# Altium PCB Transmitter.PcbDoc
Units mil, origin at the board's own origin, x right, y up, seen from the top; angles counter-clockwise.
Board outline 6000 x 4000 mil, 2 copper layers (Top Layer, Bottom Layer); 31 components, 14 nets, 129 pads, 0 vias.
Unrouted connection lines stored in the file: 29.
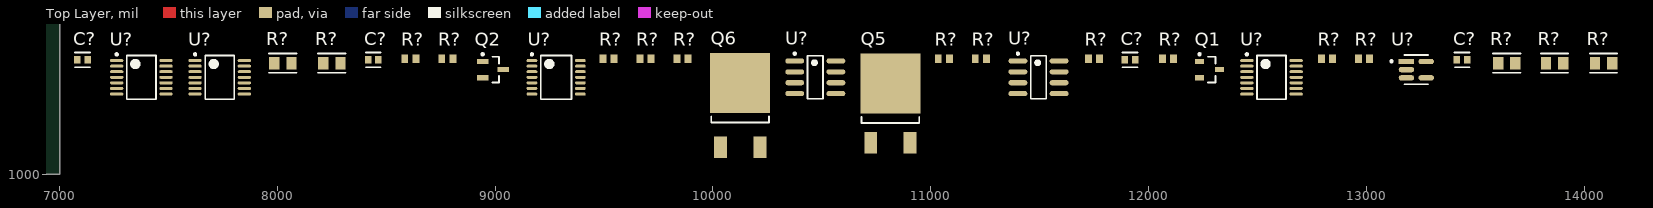
[diagram p0: Top Layer view]
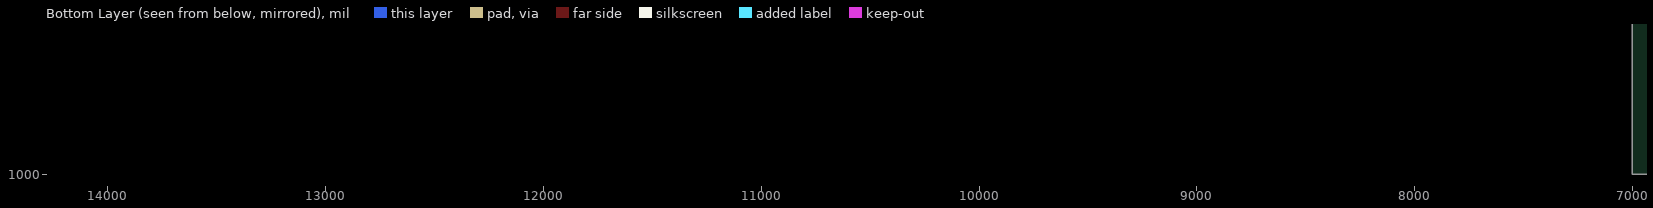
[diagram p1: Bottom Layer view, seen from below]

## Layer stack, top to bottom
Top Solder: solder mask 0.4, Solder Resist, Dk 3.5
Top Layer: signal copper 1.4
Dielectric 1: dielectric 12.6, FR-4, Dk 4.8
Bottom Layer: signal copper 1.4
Bottom Solder: solder mask 0.4, Solder Resist, Dk 3.5

## Board outline
1000,1000 7000,1000 7000,5000 1000,5000

## Design rules (kind name [scope] priority, off if disabled: settings)
Clearance [All] p1: gap=10 ignorepadtopadclearanceinfootprint=FALSE except(0: Arc-Hole Track-Hole SMDPad-Hole THPad-Hole Via-Hole Fill-Hole Poly-Hole Region-Hole Text-Hole)
PolygonConnect [All] p1: connectstyle=Relief reliefconductorwidth=10 reliefentries=4 polygonreliefangle="90 Angle" airgapwidth=10
RoomDefinition Transmitter [InComponentClass('Transmitter')] p1: confinementstyle=ConfineIn formatcopy=TRUE lockcomponents=FALSE outline 7045,1060 14185,1060 14185,1670 7045,1670
RoutingVias [All] p1: holewidth=28 width=50 viastyle="Through Hole" minholewidth=28 minwidth=50 maxholewidth=28 maxwidth=50
SolderMaskExpansion [All] p1: expansion=4 istentingtop=FALSE
Width [All] p1: maxlimit=10 minlimit=10 preferedwidth=10
30 further rules are at their usual default settings.

## Classes and differential pairs
component class Transmitter: C? Q1 Q2 Q5 Q6 R? U?

## Components (designator, comment, footprint, x,y, rotation, side; value= is the part's Value field where it differs from the comment)
C? "47pF" FP-C0603C-CF-MFG 7105,1525 r0 top value="470 pF"
C? "47pF" FP-C0603C-CF-MFG 13440,1525 r0 top value="470 pF"
C? "47pF" FP-C0603C-CF-MFG 11915,1525 r0 top value="470 pF"
C? "47pF" FP-C0603C-CF-MFG 8440,1525 r0 top value="470 pF"
Q1 "BC857C" INF-SOT23_N 12280,1480 r0 top
Q2 "BC847B" INF-SOT23_M 8990,1480 r0 top
Q5 "IRFR9024NTRPBF" FP-PG-TO252-3-MFG 10815,1325 r0 top
Q6 "AUIRFR024N" FP-TO-252AA-MFG 10125,1360 r0 top
R? "RC0805FR-4,99" FP-RC0805-0_6-IPC_A 13865,1510 r0 top
R? "150K" RESC1609X50X30NL8T20 9520,1530 r0 top
R? "CRCW0603  100" RESC1609X50X30NL8T20 12820,1530 r0 top
R? "CRCW060310K0FKEA" RESC1609X50X30NL8T20 12090,1530 r0 top
R? "RC0805FR-4,99" FP-RC0805-0_6-IPC_A 14090,1510 r0 top
R? "RC0805FR-07100KL" FP-RC0805-0_6-IPC_A 8025,1510 r0 top
R? "RC0805FR-4,99" FP-RC0805-0_6-IPC_A 13645,1510 r0 top
R? "CRCW060310K0FKEA" RESC1609X50X30NL8T20 8610,1530 r0 top
R? "CRCW0603  5,9K" RESC1609X50X30NL8T20 11750,1530 r0 top
R? "CRCW060310K0FKEA" RESC1609X50X30NL8T20 9860,1530 r0 top
R? "RC0805FR-07100KL" FP-RC0805-0_6-IPC_A 8250,1510 r0 top
R? "CRCW060310K0FKEA" RESC1609X50X30NL8T20 11230,1530 r0 top
R? "30K" RESC1609X50X30NL8T20 8780,1530 r0 top
R? "CRCW0603  1K" RESC1609X50X30NL8T20 11060,1530 r0 top
R? "CRCW0603  100" RESC1609X50X30NL8T20 12990,1530 r0 top
R? "CRCW0603  1K" RESC1609X50X30NL8T20 9690,1530 r0 top
U? "AD8544ARUZ-REEL" ADI-RU-14_N 7375,1445 r0 top
U? "INA139NA/3K" FP-DBV0005A-IPC_A 13230,1480 r0 top
U? "TC4426AEOA713" SOIC-OA8_N 10470,1445 r0 top
U? "AD8544ARUZ-REEL" ADI-RU-14_N 7735,1445 r0 top
U? "AD8544ARUZ-REEL" ADI-RU-14_L 9280,1445 r0 top
U? "TC4426AEOA713" SOIC-OA8_N 11495,1445 r0 top
U? "AD8544ARUZ-REEL" ADI-RU-14_N 12565,1445 r0 top

## Footprints (in the part's own frame and the unit in brackets; to place one, negate y for a bottom-side part, rotate by r counter-clockwise, add the part's x,y. Pads: shape width x height; smd on the part's side, far side on the other; paste and mask are expansions set on the pad)
ADI-RU-14_L [mm] "SOP, 14-Leads, Body 5x4.4mm, Pitch 0.65mm, IPC High Density"
  oval 1.25x0.35 smd: 1(-2.825,1.95) 2(-2.825,1.3) 3(-2.825,0.65) 4(-2.825,0) 5(-2.825,-0.65) 6(-2.825,-1.3) 7(-2.825,-1.95) 8(2.825,-1.95) 9(2.825,-1.3) 10(2.825,-0.65) 11(2.825,0) 12(2.825,0.65) 13(2.825,1.3) 14(2.825,1.95)
  silkscreen extent -2.95,-2.55 1.8,2.8, body extent -2.25,-2.55 2.25,2.55, height 1.2
ADI-RU-14_N [mm] "SOP, 14-Leads, Body 5x4.4mm, Pitch 0.65mm, IPC Medium Density"
  oval 1.55x0.35 smd: 1(-2.875,1.95) 2(-2.875,1.3) 3(-2.875,0.65) 4(-2.875,0) 5(-2.875,-0.65) 6(-2.875,-1.3) 7(-2.875,-1.95) 8(2.875,-1.95) 9(2.875,-1.3) 10(2.875,-0.65) 11(2.875,0) 12(2.875,0.65) 13(2.875,1.3) 14(2.875,1.95)
  silkscreen extent -3,-2.55 1.7,2.8, body extent -2.25,-2.55 2.25,2.55, height 1.2
FP-C0603C-CF-MFG [mm]
  rect 0.75x0.9 smd paste+0 mask+0: 1(-0.6,0) 2(0.6,0)
  silkscreen extent -0.87,-0.85 0.88,0.85, body extent -1.2,-0.6 1.2,0.6, height 0.25
FP-DBV0005A-IPC_A [mm]
  rect 1.805x0.612 smd paste+0 mask+0: 1(-1.15,0.95)
  rrect100% 1.805x0.612 smd paste+0 mask+0: 2(-1.15,0) 3(-1.15,-0.95) 4(1.15,-0.95) 5(1.15,0.95)
  silkscreen extent -3.03,-1.7 1.4,1.7, body extent -2.55,-1.95 2.55,1.95, height 0.25
FP-PG-TO252-3-MFG [mm]
  rect 1.5x2.5 smd paste+0 mask+0: 1(-2.3,-4.575) 3(2.3,-4.575)
  rect 7x7 smd paste+0 mask+0: 4(0,2.325)
  silkscreen extent -3.36,-2.28 3.36,-1.55, body extent -3.6,-5.92 3.6,5.92, height 0.25
FP-RC0805-0_6-IPC_A [mil]
  rect 47.56x57.56 smd paste+0 mask+0: 1(-39.45,0) 2(39.45,0)
  silkscreen extent -63,-45 63,45, body extent -83,-48 83,48, height 10
FP-TO-252AA-MFG [mm]
  rect 1.5x2.5 smd paste+0 mask+0: 1(-2.3,-6.025) 3(2.3,-6.025)
  rect 7x7 smd paste+0 mask+0: 4(0,1.5)
  silkscreen extent -3.36,-3.11 3.36,-2.37, body extent -3.6,-7.37 3.6,5.1, height 0.25
INF-SOT23_M [mm] "SOT23, 3-Leads, Body 2.9x1.3 mm, Pitch 0.95 mm, IPC Low Density"
  rect 1.35x0.6 smd: 1(-1.2,0.95) 2(-1.2,-0.95) 3(1.2,0)
  silkscreen extent -1.32,-1.5 0.7,1.92, body extent -0.7,-1.5 0.7,1.5, height 1.1
INF-SOT23_N [mm] "SOT23, 3-Leads, Body 2.9x1.3 mm, Pitch 0.95 mm, IPC Medium Density"
  rect 1.05x0.6 smd: 1(-1.15,0.95) 2(-1.15,-0.95) 3(1.15,0)
  silkscreen extent -1.27,-1.5 0.7,1.92, body extent -0.7,-1.5 0.7,1.5, height 1.1
RESC1609X50X30NL8T20 [mm] "Chip Resistor, 2-Leads, Body 1.65x0.95mm, IPC Medium Density"
  rect 0.8x0.95 smd: 1(-0.65,0) 2(0.65,0)
  body extent -0.82,-0.48 0.82,0.48, height 0.5
SOIC-OA8_N [mm] "SOIC, 8-Leads, Body 4.9x3.9mm, Pitch 1.27mm, IPC Medium Density"
  oval 2.2x0.6 smd: 1(-2.4,1.905) 2(-2.4,0.635) 3(-2.4,-0.635) 4(-2.4,-1.905) 5(2.4,-1.905) 6(2.4,-0.635) 7(2.4,0.635) 8(2.4,1.905)
  silkscreen extent -2.52,-2.5 0.9,2.88, body extent -2,-2.5 2,2.5, height 1.75

## Part data
C? C? C? C?: library part CMP-2006-03816-2, "CAP CER 470PF 50V X7R 0603", Capacitance="470 pF", Manufacturer=KEMET, Manufacturer Part Number=C0603C471K5RACTU, Package=C0603C-CF, Temperature="-55°C to +125°C", Temperature Characteristic=X7R, Temperature Coefficient=30ppm/°C, Temperature Range High=+125°C, Temperature Range Low=-55°C, Tolerance=0.1, Voltage Rating="50 V", Automotive=Yes, Automotive Grade="Grade 1", Category=Cap, ComponentLink2Description=Datasheet, ComponentLink2URL=https://api.kemet.com/component-edge/download/datasheet/C0603C100J5GACAUTO.pdf, Device Class L1="Passive Components", Device Class L2=Capacitors, Device Class L3="Ceramic Capacitors", Digikey Description="CAP CER 470PF 50V X7R 0603", Height=0.87mm, Lead Free=Yes, Material=Ceramic, Mouser Description="Ceramic Capacitor, 470Pf, 50V, X7R, 10%, 0603, Full Reel", Octopart=https://octopart.com/c0603c471k5ractu-kemet-89311, RoHS=TRUE
Q1: library part CMP-1177-00039-1, "PNP Silicon AF Transistor, 45 V VCEO, 100 mA IC, SOT23, Reel, Green", Manufacturer=Infineon, ComponentLink1Description="Manufacturer URL", ComponentLink1URL=http://www.infineon.com/, ComponentLink2Description=Datasheet, ComponentLink2URL=http://www.infineon.com/dgdl/bc857series_bc858series_bc859series_bc860series.pdf?folderId=db3a304314dca389011541d30fa21656&fileId=db3a304314dca389011541da0e3a1661, ComponentLink3Description="Package Specification", ComponentLink3URL=http://www.infineon.com/dgdl/SOT23-Package_Overview.pdf?folderId=db3a30431936bc4b0119532290053c66&fileId=db3a30431936bc4b0119533468123c85, fT (typ)="250Â MHz", Green=TRUE, IBM (max)="200Â mA", IC (max)="100Â mA", ICBO (max)="15Â nA", ICM (max)="200Â mA", Mounting Technology="Surface Mount", PackageDescription="3-Pin Small Outline Transistor Package, 1.3 x 2.9 mm Body, 0.95 mm Pitch", PackageReference=SOT23, PackageVersion=Apr-08, Packing=Reel, PartNumber=BC857C, Polarity=PNP, Ptot (max)="330Â mW", VCBO (max)="50Â V", VCEO (max)="45Â V", VEBO (max)="5Â V"
Q2: library part CMP-1177-00042-1, "NPN Silicon AF Transistor, 45 V VCEO, 100 mA IC, SOT23, Reel, Green", Manufacturer=Infineon, ComponentLink1Description="Manufacturer URL", ComponentLink1URL=http://www.infineon.com/, ComponentLink2Description=Datasheet, ComponentLink2URL=http://www.infineon.com/dgdl/bc847series_bc848series_bc849series_bc850series.pdf?folderId=db3a304314dca389011541d30fa21656&fileId=db3a304314dca389011541d4630a1657, ComponentLink3Description="Package Specification", ComponentLink3URL=http://www.infineon.com/dgdl/SOT23-Package_Overview.pdf?folderId=db3a30431936bc4b0119532290053c66&fileId=db3a30431936bc4b0119533468123c85, fT (typ)="250Â MHz", Green=TRUE, IBM (max)="200Â mA", IC (max)="100Â mA", ICBO (max)="15Â nA", ICM (max)="200Â mA", Mounting Technology="Surface Mount", PackageDescription="3-Pin Small Outline Transistor Package, 1.3 x 2.9 mm Body, 0.95 mm Pitch", PackageReference=SOT23, PackageVersion=Apr-08, Packing=Reel, PartNumber=BC847B, Polarity=NPN, Ptot (max)="330Â mW", VCBO (max)="50Â V", VCEO (max)="45Â V", VEBO (max)="6Â V"
Q5: library part CMP-32901-000043-2, "MOSFET P-CH 55V 11A DPAK", Case/Package=TO-252-3, Continuous Drain Current (ID)=11A, Drain to Source Breakdown Voltage=-55V, Drain to Source Resistance=175mR, Gate to Source Voltage (Vgs)=20V, Input Capacitance=350pF, Max Operating Temperature=150°C, Max Power Dissipation=38W, Min Operating Temperature=-55°C, Threshold Voltage=-4V, Contact Plating=Tin, Drain to Source Voltage (Vdss)=-55V, Halogen Free="Halogen Free", Height=0.094inch, Lead Free="Contains Lead", Max Dual Supply Voltage=-55V, Mount="Surface Mount", Number of Pins=3, Packaging="Tape and Reel", Power Dissipation=38W, Rds On Max=175mR, REACH SVHC="No SVHC", Rise Time=55ns, RoHS Compliant=Yes, Turn-Off Delay Time=23ns, Turn-On Delay Time=13ns, Width=0.245inch
Q6: library part CMP-00196-73408686-1, "AUIRFR024N Automotive Q101 55V Single N-Channel HEXFET Power MOSFET in a D-Pak Package", Case/Package=DPAK, Continuous Drain Current (ID)=17A, Drain to Source Breakdown Voltage=55V, Drain to Source Resistance=75mΩ, Gate to Source Voltage (Vgs)=20V, Input Capacitance=370pF, Max Operating Temperature=175°C, Max Power Dissipation=45W, Min Operating Temperature=-55°C, Threshold Voltage=2V, Contact Plating=Tin, Drain to Source Voltage (Vdss)=55V, Element Configuration=Single, Fall Time=27ns, Height=2.39mm, Length=6.73mm, Mount="Surface Mount", NexarPartId=73408686, Number of Elements=1, Number of Pins=3, Power Dissipation=45W, Radiation Hardening=No, Rds On Max=75mΩ, REACH SVHC="No SVHC", Rise Time=34ns, RoHS=Compliant, Turn-Off Delay Time=19ns, Turn-On Delay Time=4.9ns, Width=6.22mm
R? R? R?: library part CMP-2100-03668-5, "RES 4,99 OHM 1% 1/8W 0805", Case Code (Imperial)=0805, Case Code (Metric)=2012, Max Operating Temperature=155°C, Max Power Dissipation=125mW, Min Operating Temperature=-55°C, Package Quantity=1, Resistance=100kR, Resistance Tolerance=1%, Resistor Type="Thick Film", Temperature Coefficient=100ppm/°C, Voltage Rating=150V, Case/Package=0805, Construction=Rectangular, Depth=1.25mm, Features="Moisture Resistant", Height=0.024inch, Lead Free="Lead Free", Lead Pitch=0.4mm, Length=0.079inch, Military Standard=Not, Number of Pins=2, Number of Terminations=2, Packaging="Tape and Reel", Power Rating=125mW, RoHS Compliant=Yes, Series=RC, Size Code=0805, Technology="THICK FILM", Termination=SMD/SMT, Tolerance=1%, Voltage Rating (DC)=150V, Width=0.049inch
R? R?: library part CMP-1666-00005-4, "Chip Resistor, 150 KOhm, +/- 1%, 100 mW, -55 to 155 degC, 0603 (1608 Metric), RoHS, Tape and Reel", Manufacturer="Vishay Semiconductor", Max Operating Temperature="155 degC", Min Operating Temperature="-55 degC", Package Quantity=5000, Voltage Rating="75 V", ComponentLink1Description="Manufacturer URL", ComponentLink1URL=http://www.vishay.com/, ComponentLink2Description=Datasheet, ComponentLink2URL=https://datasheet.ciiva.com/11809/0900766b80d98afc-11809037.pdf, DatasheetVersion=06/2012, Height="0.45 mm", Length="1.55 mm", Mounting Technology="Surface Mount", PackageDescription="2-Pin Surface Mount Device, Body 1.575 x 0.85 mm", PackageReference=0603, Packaging="Tape and Reel", REACH SVHC=Unknown, RoHSCompliant=true
R? R? R? R? R? R? R? R?: library part CMP-1666-00005-4, "Chip Resistor, 10 KOhm, +/- 1%, 100 mW, -55 to 155 degC, 0603 (1608 Metric), RoHS, Tape and Reel", Manufacturer="Vishay Semiconductor", Max Operating Temperature="155 degC", Min Operating Temperature="-55 degC", Package Quantity=5000, Voltage Rating="75 V", ComponentLink1Description="Manufacturer URL", ComponentLink1URL=http://www.vishay.com/, ComponentLink2Description=Datasheet, ComponentLink2URL=https://datasheet.ciiva.com/11809/0900766b80d98afc-11809037.pdf, DatasheetVersion=06/2012, Height="0.45 mm", Length="1.55 mm", Mounting Technology="Surface Mount", PackageDescription="2-Pin Surface Mount Device, Body 1.575 x 0.85 mm", PackageReference=0603, Packaging="Tape and Reel", REACH SVHC=Unknown, RoHSCompliant=true
R? R?: library part CMP-2100-03668-5, "RES 100K OHM 1% 1/8W 0805", Case Code (Imperial)=0805, Case Code (Metric)=2012, Max Operating Temperature=155°C, Max Power Dissipation=125mW, Min Operating Temperature=-55°C, Package Quantity=1, Resistance=100kR, Resistance Tolerance=1%, Resistor Type="Thick Film", Temperature Coefficient=100ppm/°C, Voltage Rating=150V, Case/Package=0805, Construction=Rectangular, Depth=1.25mm, Features="Moisture Resistant", Height=0.024inch, Lead Free="Lead Free", Lead Pitch=0.4mm, Length=0.079inch, Military Standard=Not, Number of Pins=2, Number of Terminations=2, Packaging="Tape and Reel", Power Rating=125mW, RoHS Compliant=Yes, Series=RC, Size Code=0805, Technology="THICK FILM", Termination=SMD/SMT, Tolerance=1%, Voltage Rating (DC)=150V, Width=0.049inch
R?: library part CMP-1666-00005-4, "Chip Resistor, 5,9 KOhm, +/- 1%, 100 mW, -55 to 155 degC, 0603 (1608 Metric), RoHS, Tape and Reel", Manufacturer="Vishay Semiconductor", Max Operating Temperature="155 degC", Min Operating Temperature="-55 degC", Package Quantity=5000, Voltage Rating="75 V", ComponentLink1Description="Manufacturer URL", ComponentLink1URL=http://www.vishay.com/, ComponentLink2Description=Datasheet, ComponentLink2URL=https://datasheet.ciiva.com/11809/0900766b80d98afc-11809037.pdf, DatasheetVersion=06/2012, Height="0.45 mm", Length="1.55 mm", Mounting Technology="Surface Mount", PackageDescription="2-Pin Surface Mount Device, Body 1.575 x 0.85 mm", PackageReference=0603, Packaging="Tape and Reel", REACH SVHC=Unknown, RoHSCompliant=true
U? U? U? U?: library part CMP-0384-01917-1, "Quad Channel RRIO Operational Amplifier, 1 MHz BW, 920 mV/us SR, Industrial, 14-pin SOP (RU-14), Reel", Amplifiers Per Package=4, Generic Part Number=AD8544, Input Bias Current=4pA, Input Offset Voltage=1mV, Manufacturer="Analog Devices", Automotive Qualified=Yes, Code_JEDEC=MO-153AB-1, ComponentLink1Description="Manufacturer URL", ComponentLink1URL=http://www.analog.com/en/index.html, ComponentLink2Description=Datasheet, ComponentLink2URL=http://www.analog.com/static/imported-files/data_sheets/AD8541_8542_8544.pdf, ComponentLink3Description="Package Specification", ComponentLink3URL=http://www.analog.com/static/imported-files/packages/36057385283879153717235186773RU14.pdf, DatasheetVersion="Rev. G", Iq/Amp=65uA, Mounting Technology="Surface Mount", PackageDescription="14-Pin Thin Shrink Small Outline Package, Body 5 x 4.4 mm, Pitch 0.65 mm", PackageReference=RU-14, PartNumber=AD8544ARUZ-REEL, Slew Rate=920mV/us, Small Signal Bandwidth=1MHz, V Span Max=5.5V, V Span Min=2.7V
U?: library part CMP-04910-000043-1, "IC CURRENT MONITOR 0.5% SOT23-5", Case/Package=SOT-23, Input Bias Current=10uA, Input Offset Voltage (Vos)=1mV, Max Operating Temperature=125°C, Max Supply Voltage=40V, Min Operating Temperature=-40°C, Min Supply Voltage=2.7V, Nominal Supply Current=125uA, Package Quantity=3000, Accuracy=0.5%, Bandwidth=440kHz, Common Mode Rejection Ratio=100dB, Lead Free="Lead Free", Mount="Surface Mount", Number of Amplifiers=1, Number of Channels=1, Number of Elements=1, Number of Pins=5, Packaging="Tape and Reel", Radiation Hardening=No, RoHS Compliant=Yes, Series=INA139, Supply Current=125uA, Weight=0.000617oz
U? U?: library part CMP-0137-00128-1, "1.5A Dual High-Speed Power MOSFET Driver, Inverting, Industrial Temperature, Tape and Reel", Code_IPC=SOIC127P600-8, DatasheetVersion="revD, Jan-2006", PackageDescription="8-Lead Plastic Small Outline (OA) - Narrow, 3.90mm Body [SOIC]", PackageReference=SOIC-OA8, PackageVersion="revBB, Aug-2009"

## Nets (pads, with @x,y where several pads share a name; then routed paths per layer and width w, separated by ;. In a path a pad name is that pad's centre, name@x,y a point inside that pad or via, vN(x,y) a via of type N, cw(c..) or ccw(c..) an arc to the next point about the centre after c; other vN are vias at no path point)
GND: C?.1@11891.38,1525 Q2.2 R?.1@7985.55,1510 R?.1@8210.55,1510 R?.1@11724.41,1530 U?.2@13184.71,1480 U?.3@10375.51,1420 U?.3@11400.51,1420
NetC?_1: C?.1@13416.38,1525 Q5.3 R?.1@13605.55,1510 R?.2@12115.59,1530 U?.4@13275.29,1442.6
NetC?_2: C?.2@8463.62,1525 Q2.1 R?.1@8584.41,1530
NetQ1_3: Q1.3 R?.1@11204.41,1530 R?.2@11085.59,1530
NetQ2_3: Q2.3 R?.1@9834.41,1530 R?.2@9715.59,1530
NetQ5_1: Q5.1 R?.2@11255.59,1530
NetQ5_4: Q5.4 Q6.4
NetQ6_1: Q6.1 R?.2@9885.59,1530
NetR?_1: R?.1@9664.41,1530 U?.5@10564.49,1370
NetR?_2: R?.2@11775.59,1530 R?.2@12845.59,1530 U?.1@13184.71,1517.4
NetU?_6: U?.6@9168.78,1393.82 U?.7@9168.78,1368.23
NetU?_8: U?.8@7848.19,1368.23 U?.9@7848.19,1393.82
NetU?_13: U?.13@7488.19,1496.18 U?.14@7488.19,1521.77
VCC: Q1.2 R?.2@13904.45,1510 R?.2@14129.45,1510 U?.5@13275.29,1517.4
pads on no net: C?.1@7081.38,1525 C?.1@8416.38,1525 C?.2@7128.62,1525 C?.2@11938.62,1525 C?.2@13463.62,1525 Q1.1 Q6.3 R?.1@8754.41,1530 R?.1@9494.41,1530 R?.1@11034.41,1530 R?.1@12064.41,1530 R?.1@12794.41,1530 R?.1@12964.41,1530 R?.1@13825.55,1510 R?.1@14050.55,1510 R?.2@8064.45,1510 R?.2@8289.45,1510 R?.2@8635.59,1530 R?.2@8805.59,1530 R?.2@9545.59,1530 R?.2@13015.59,1530 R?.2@13684.45,1510 U?.1@7261.81,1521.77 U?.1@7621.81,1521.77 U?.1@9168.78,1521.77 U?.1@10375.51,1520 U?.1@11400.51,1520 U?.1@12451.81,1521.77 U?.2@7261.81,1496.18 U?.2@7621.81,1496.18 U?.2@9168.78,1496.18 U?.2@10375.51,1470 U?.2@11400.51,1470 U?.2@12451.81,1496.18 U?.3@7261.81,1470.59 U?.3@7621.81,1470.59 U?.3@9168.78,1470.59 U?.3@12451.81,1470.59 U?.3@13184.71,1442.6 U?.4@7261.81,1445 U?.4@7621.81,1445 U?.4@9168.78,1445 U?.4@10375.51,1370 U?.4@11400.51,1370 U?.4@12451.81,1445 U?.5@7261.81,1419.41 U?.5@7621.81,1419.41 U?.5@9168.78,1419.41 U?.5@11589.49,1370 U?.5@12451.81,1419.41 U?.6@7261.81,1393.82 U?.6@7621.81,1393.82 U?.6@10564.49,1420 U?.6@11589.49,1420 U?.6@12451.81,1393.82 U?.7@7261.81,1368.23 U?.7@7621.81,1368.23 U?.7@10564.49,1470 U?.7@11589.49,1470 U?.7@12451.81,1368.23 U?.8@7488.19,1368.23 U?.8@9391.22,1368.23 U?.8@10564.49,1520 U?.8@11589.49,1520 U?.8@12678.19,1368.23 U?.9@7488.19,1393.82 U?.9@9391.22,1393.82 U?.9@12678.19,1393.82 U?.10 U?.11 U?.12 U?.13@7848.19,1496.18 U?.13@9391.22,1496.18 U?.13@12678.19,1496.18 U?.14@7848.19,1521.77 U?.14@9391.22,1521.77 U?.14@12678.19,1521.77